# Altium PCB UVLO_MODULE_PCB ASCII REV Project_PCB_Rev.Project_SCH_Rev.PcbDoc
Units mil, origin at the board's own origin, x right, y up, seen from the top; angles counter-clockwise.
Board outline 2362.2 x 2362.2 mil, 2 copper layers (Top, Bottom), stack 61.811 mil thick; 70 components, 25 nets, 163 pads, 59 vias.
Unrouted connection lines stored in the file: 42.
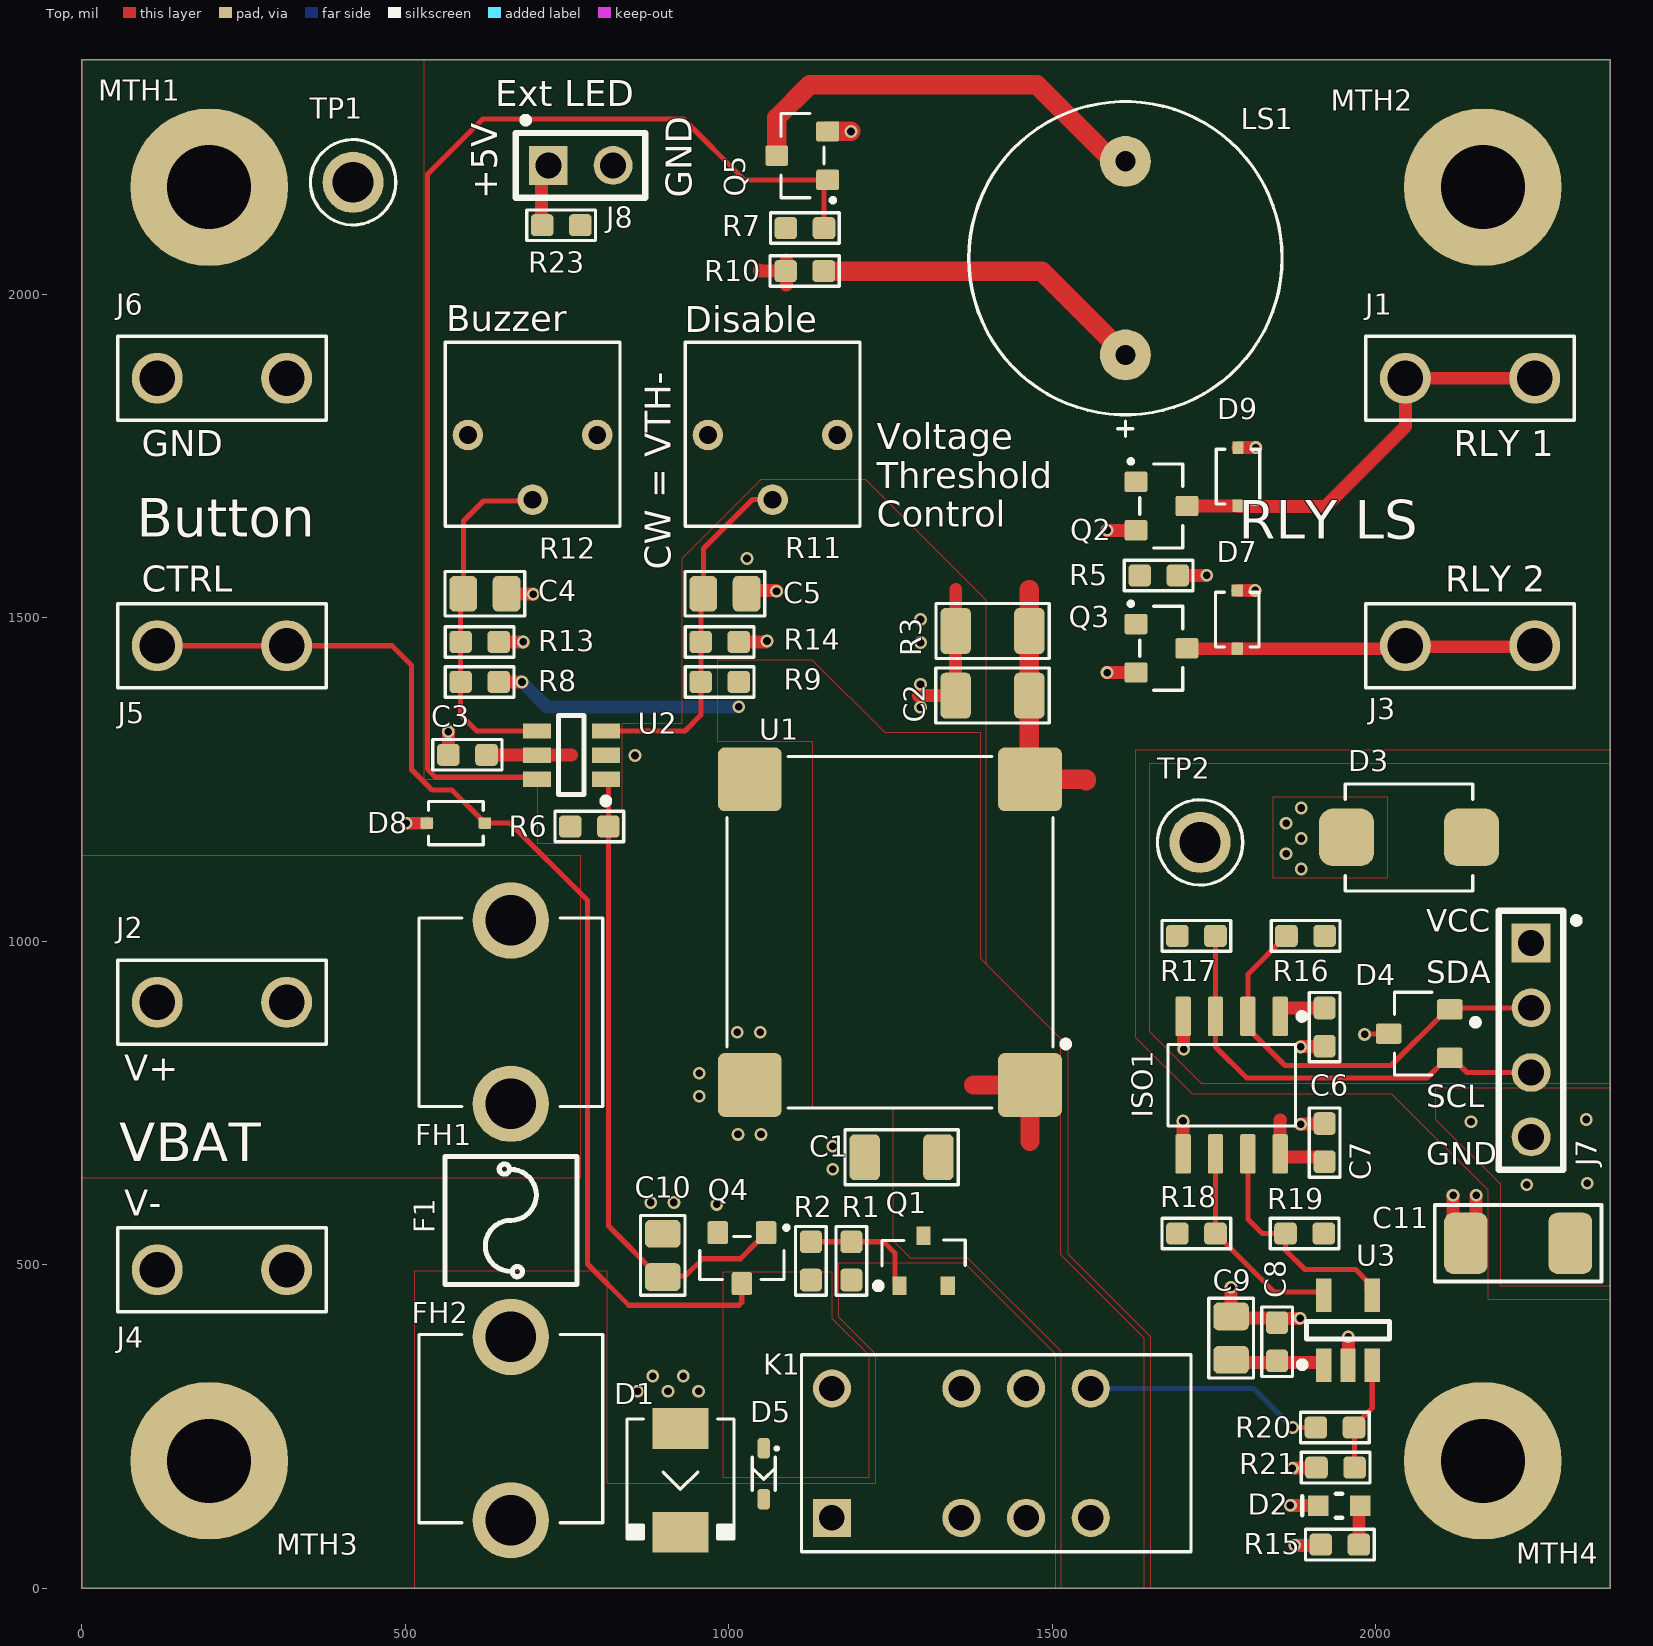
[diagram p0: Top view]
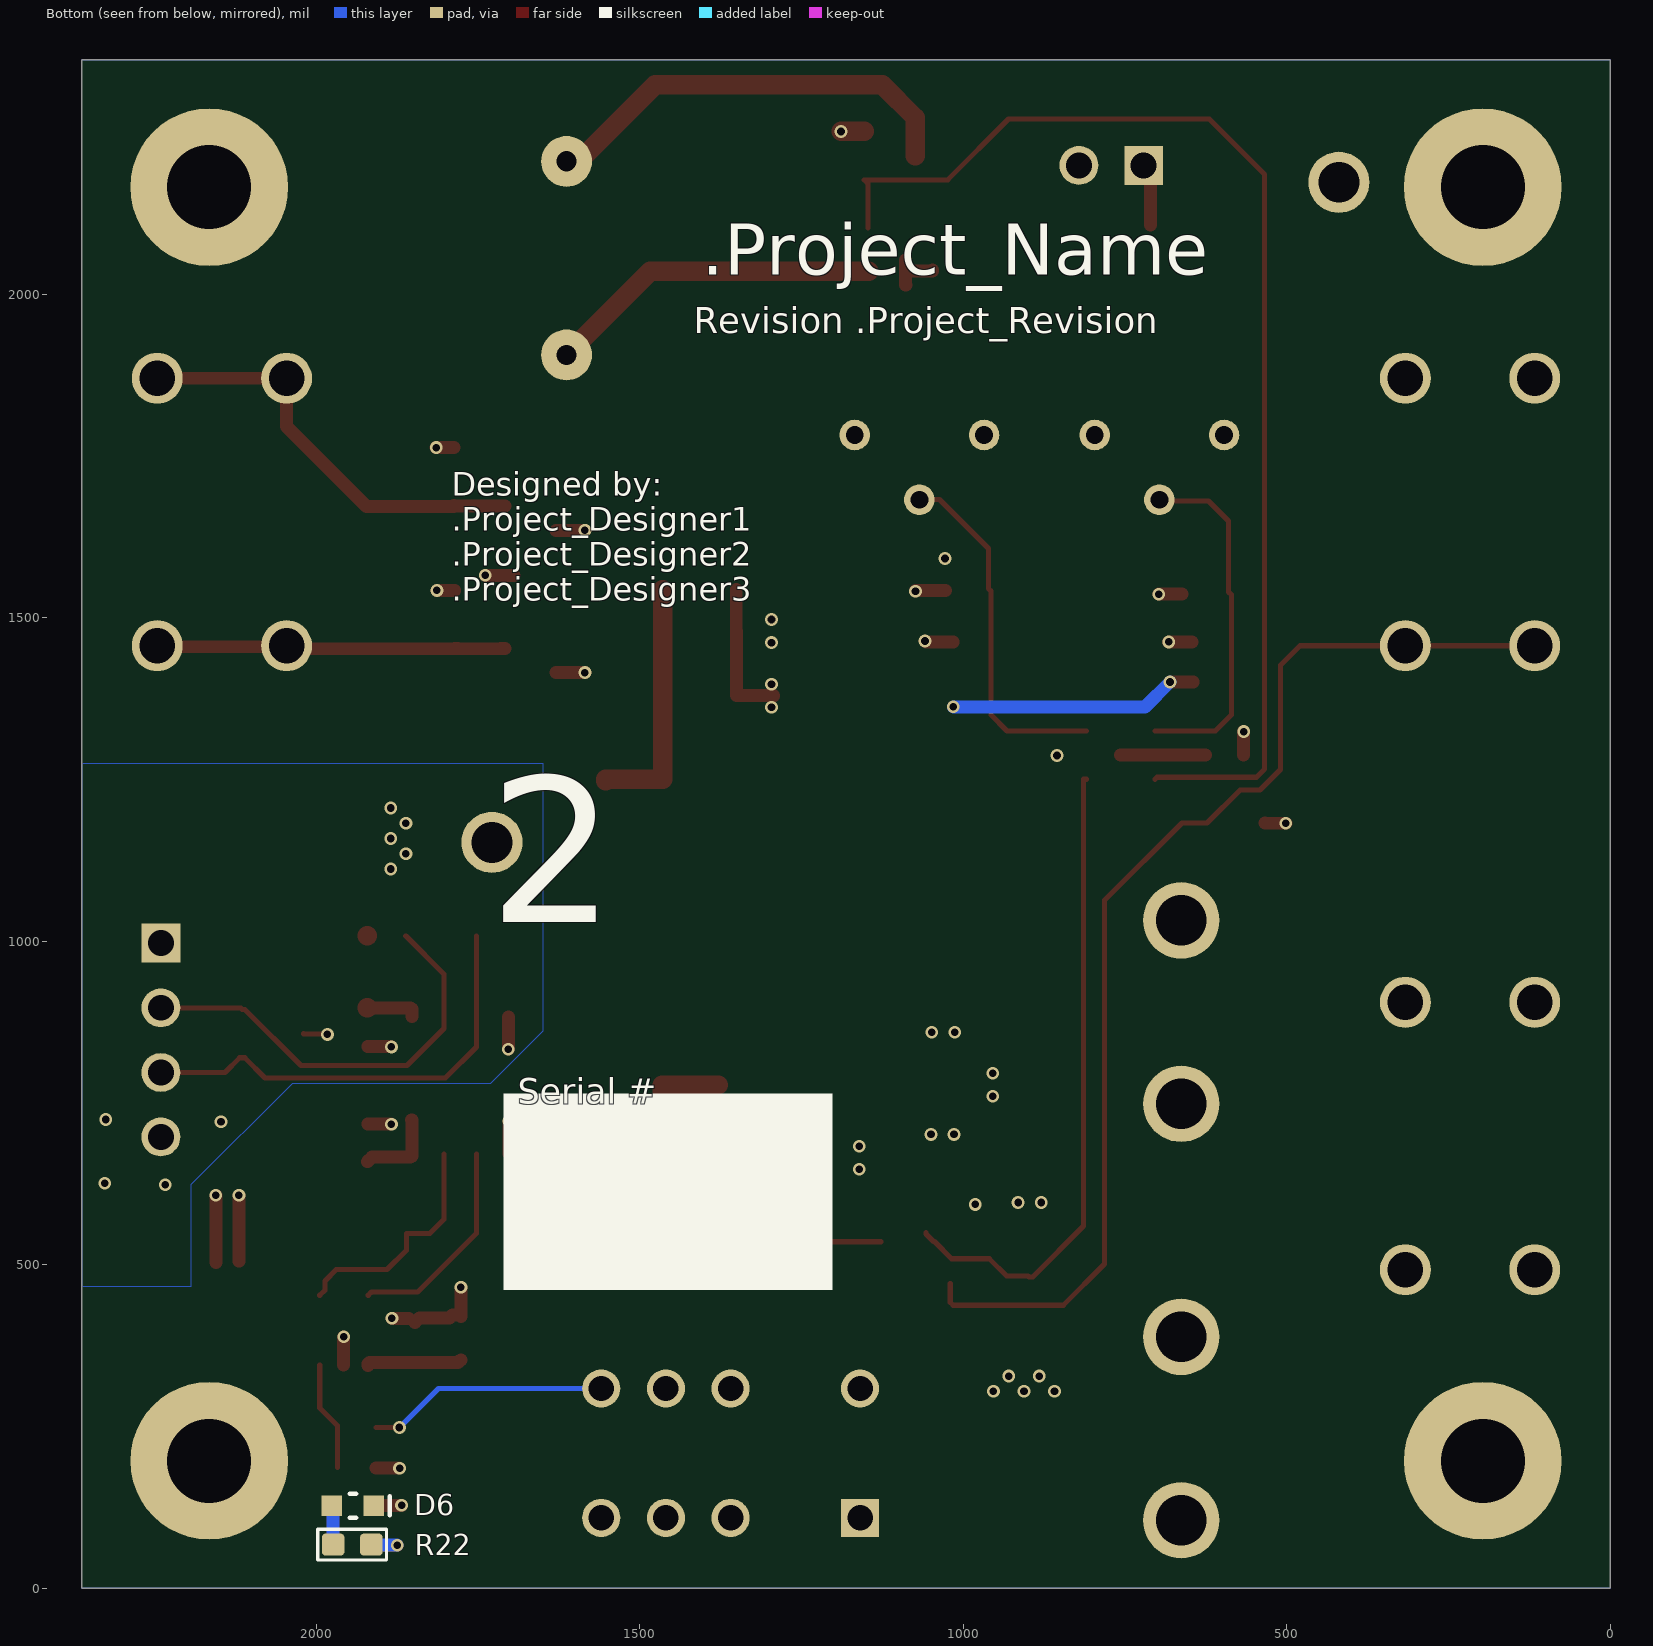
[diagram p1: Bottom view, seen from below]

## Layer stack, top to bottom
Top Solder: solder mask 1, Solder Resist, Dk 4
Top: signal copper 1.378
Dielectric 1: prepreg 59.0551, PP-006, Dk 4.3
Bottom: signal copper 1.378
Bottom Solder: solder mask 0.6, Solder Resist, Dk 3.5

## Board outline
0,0 0,2362.2 2362.2,2362.2 2362.2,0

## Design rules (kind name [scope] priority, off if disabled: settings)
AssemblyTestPointUsage [All] p0: scope1count=1 scope1_0_kind=Board scope1_0_value=Board scope2count=1 scope2_0_kind=Board scope2_0_value=Board commentlength=0
AssemblyTestpoint [All] p0: scope1count=1 scope1_0_kind=Board scope1_0_value=Board scope2count=1 scope2_0_kind=Board scope2_0_value=Board commentlength=0
BoardOutlineClearance BoardOutlineClearance-Silk [All] p0 off: scope1count=1 scope1_0_kind=Board scope1_0_value=Board scope2count=1 scope2_0_kind=Board scope2_0_value=Board commentlength=94 gap=0 // Protel DXP Scope 1 Expression Was: (OnLayer('Bottom Overlay')) OR (OnLayer('Top Overlay'))
BoardOutlineClearance [All] p0: scope1count=1 scope1_0_kind=Board scope1_0_value=Board scope2count=1 scope2_0_kind=Board scope2_0_value=Board commentlength=0 gap=7.87
BoardOutlineClearance BoardOutlineClearance-Silk [(OnLayer('Bottom Overlay')) OR (OnLayer('Top Overlay'))] p1: gap=0 ignorepadtopadclearanceinfootprint=FALSE
BoardOutlineClearance [All] p2: gap=7.87 ignorepadtopadclearanceinfootprint=FALSE
Clearance Clearance_EXT [All] p0 off: scope1count=1 scope1_0_kind=NetClass scope1_0_value=EXT scope2count=1 scope2_0_kind=Board scope2_0_value=Board commentlength=60 gap=20 // Protel DXP Scope 2 Expression Was: NOT InNetClass('EXT')
Clearance [All] p0: scope1count=1 scope1_0_kind=Board scope1_0_value=Board scope2count=1 scope2_0_kind=Board scope2_0_value=Board commentlength=0 gap=8
Clearance Clearance_EXT [InNetClass('EXT') vs NOT InNetClass('EXT')] p1: gap=20 ignorepadtopadclearanceinfootprint=FALSE
Clearance [All] p2: gap=8 ignorepadtopadclearanceinfootprint=FALSE except(12: THPad-THPad Via-Via)
ComponentClearance "Schematic Component Clearance Constraint" [All] p0: scope1count=1 scope1_0_kind=Component scope1_0_value=F1 scope2count=1 scope2_0_kind=Board scope2_0_value=Board commentlength=0 gap=0 collisioncheckmode=3
ComponentClearance [All] p0: scope1count=1 scope1_0_kind=Board scope1_0_value=Board scope2count=1 scope2_0_kind=Board scope2_0_value=Board commentlength=0 gap=10 collisioncheckmode=3
ComponentClearance "Schematic Component Clearance Constraint" [InComponent('F1')] p1: gap=0 collisioncheckmode=3 verticalgap=0 showdistances=FALSE
ComponentClearance [All] p2: gap=10 collisioncheckmode=3 verticalgap=10 showdistances=FALSE
DiffPairsRouting [All] p0: scope1count=1 scope1_0_kind=Board scope1_0_value=Board scope2count=1 scope2_0_kind=Board scope2_0_value=Board commentlength=0
DiffPairsRouting [All] p1: maxlimit=6 minlimit=6 mostfreqgap=6 toplayer_minwidth=4 toplayer_maxwidth=4 toplayer_prefwidth=4 bottomlayer_minwidth=4 bottomlayer_maxwidth=4 bottomlayer_prefwidth=4 maxuncoupledlength=500
FabricationTestPointUsage [All] p0: scope1count=1 scope1_0_kind=Board scope1_0_value=Board scope2count=1 scope2_0_kind=Board scope2_0_value=Board commentlength=0 valid=0 allowmultiple=FALSE
FabricationTestpoint [All] p0: scope1count=1 scope1_0_kind=Board scope1_0_value=Board scope2count=1 scope2_0_kind=Board scope2_0_value=Board commentlength=0 side=3 testpointundercomponent=TRUE minsize=40 maxsize=100 preferedsize=60 minholesize=0 maxholesize=40 preferedholesize=32 testpointgrid=1
FanoutControl Fanout_BGA [All] p0 off: scope1count=1 scope1_0_kind=Board scope1_0_value=Board scope2count=1 scope2_0_kind=Board scope2_0_value=Board commentlength=69 // Protel DXP Scope 1 Expression Was: IsBGA   Fanout_BGA (Default Rule)
FanoutControl Fanout_LCC [All] p0 off: scope1count=1 scope1_0_kind=Board scope1_0_value=Board scope2count=1 scope2_0_kind=Board scope2_0_value=Board commentlength=69 // Protel DXP Scope 1 Expression Was: IsLCC   Fanout_LCC (Default Rule)
FanoutControl Fanout_SOIC [All] p0 off: scope1count=1 scope1_0_kind=Board scope1_0_value=Board scope2count=1 scope2_0_kind=Board scope2_0_value=Board commentlength=71 // Protel DXP Scope 1 Expression Was: IsSOIC   Fanout_SOIC (Default Rule)
FanoutControl Fanout_Small [All] p0 off: scope1count=1 scope1_0_kind=Board scope1_0_value=Board scope2count=1 scope2_0_kind=Board scope2_0_value=Board commentlength=84 // Protel DXP Scope 1 Expression Was: (CompPinCount < 5)   Fanout_Small (Default Rule)
FanoutControl Fanout_Default [All] p0: scope1count=1 scope1_0_kind=Board scope1_0_value=Board scope2count=1 scope2_0_kind=Board scope2_0_value=Board commentlength=30 // Fanout_Default (Default Rule)
Height [All] p0: scope1count=1 scope1_0_kind=Board scope1_0_value=Board scope2count=1 scope2_0_kind=Board scope2_0_value=Board commentlength=0
HoleSize [All] p0: scope1count=1 scope1_0_kind=Board scope1_0_value=Board scope2count=1 scope2_0_kind=Board scope2_0_value=Board commentlength=0 absolutevalues=TRUE maxlimit=250 minlimit=7.87 maxpercent=80.000 minpercent=20.000
HoleSize [All] p1: absolutevalues=TRUE maxlimit=250 minlimit=7.87 maxpercent=80.000 minpercent=20.000
HoleToHoleClearance [All] p0: scope1count=1 scope1_0_kind=Board scope1_0_value=Board scope2count=1 scope2_0_kind=Board scope2_0_value=Board commentlength=0
HoleToHoleClearance [All] p1: gap=19.68 allowstackedmicrovias=TRUE
LayerPairs [All] p0: scope1count=1 scope1_0_kind=Board scope1_0_value=Board scope2count=1 scope2_0_kind=Board scope2_0_value=Board commentlength=0 enforce=TRUE
MinimumSolderMaskSliver [All] p0: scope1count=1 scope1_0_kind=Board scope1_0_value=Board scope2count=1 scope2_0_kind=Board scope2_0_value=Board commentlength=0
MinimumSolderMaskSliver [All] p1: minsoldermaskwidth=4
NetAntennae [All] p0: scope1count=1 scope1_0_kind=Board scope1_0_value=Board scope2count=1 scope2_0_kind=Board scope2_0_value=Board commentlength=0
PasteMaskExpansion [All] p0: scope1count=1 scope1_0_kind=Board scope1_0_value=Board scope2count=1 scope2_0_kind=Board scope2_0_value=Board commentlength=0 expansion=-1.97
PasteMaskExpansion [All] p1: expansion=-1.97
PlaneClearance [All] p0: scope1count=1 scope1_0_kind=Board scope1_0_value=Board scope2count=1 scope2_0_kind=Board scope2_0_value=Board commentlength=0 clearance=8
PlaneClearance [All] p1: clearance=8
PlaneConnect [All] p0: scope1count=1 scope1_0_kind=Board scope1_0_value=Board scope2count=1 scope2_0_kind=Board scope2_0_value=Board commentlength=0 planeconnectstyle=Relief reliefexpansion=20 reliefentries=4 reliefconductorwidth=10 reliefairgap=10
PlaneConnect [All] p1: pad.planeconnectstyle=Relief pad.reliefexpansion=20 pad.reliefentries=4 pad.reliefconductorwidth=10 pad.reliefairgap=10 via.planeconnectstyle=Direct via.reliefexpansion=20 via.reliefentries=4 via.reliefconductorwidth=10 via.reliefairgap=10
PolygonConnect [All] p0: scope1count=1 scope1_0_kind=Board scope1_0_value=Board scope2count=1 scope2_0_kind=Board scope2_0_value=Board commentlength=0 connectstyle=Relief reliefconductorwidth=10 reliefentries=4 polygonreliefangle="90 Angle"
PolygonConnect [All] p1: thpad.connectstyle=Relief thpad.reliefconductorwidth=10 thpad.reliefentries=4 thpad.polygonreliefangle="90 Angle" thpad.airgapwidth=10 smdpad.connectstyle=Relief smdpad.reliefconductorwidth=10 smdpad.reliefentries=4 smdpad.polygonreliefangle="90 Angle" smdpad.airgapwidth=10 via.connectstyle=Direct via.reliefconductorwidth=10 via.reliefentries=4 via.polygonreliefangle="90 Angle" via.airgapwidth=10
RoutingCorners [All] p0: scope1count=1 scope1_0_kind=Board scope1_0_value=Board scope2count=1 scope2_0_kind=Board scope2_0_value=Board commentlength=0 cornerstyle=45-Degree minsetback=100 maxsetback=100
RoutingLayers [All] p0: scope1count=1 scope1_0_kind=Board scope1_0_value=Board scope2count=1 scope2_0_kind=Board scope2_0_value=Board commentlength=0 top layer=Automatic bottom layer=Automatic
RoutingPriority [All] p0: scope1count=1 scope1_0_kind=Board scope1_0_value=Board scope2count=1 scope2_0_kind=Board scope2_0_value=Board commentlength=0
RoutingTopology [All] p0: scope1count=1 scope1_0_kind=Board scope1_0_value=Board scope2count=1 scope2_0_kind=Board scope2_0_value=Board commentlength=0 topology=Shortest
RoutingVias [All] p0: scope1count=1 scope1_0_kind=Board scope1_0_value=Board scope2count=1 scope2_0_kind=Board scope2_0_value=Board commentlength=0 holewidth=11.81 width=19.68 viastyle="Through Hole" minholewidth=11.81 minwidth=19.68 maxholewidth=248.03 maxwidth=275.59
RoutingVias [All] p1: holewidth=11.81 width=19.68 viastyle="Through Hole" minholewidth=11.81 minwidth=19.68 maxholewidth=248.03 maxwidth=275.59
ShortCircuit [All] p0: scope1count=1 scope1_0_kind=Board scope1_0_value=Board scope2count=1 scope2_0_kind=Board scope2_0_value=Board commentlength=0 allowed=FALSE
SilkToBoardRegionClearance [All] p0: scope1count=1 scope1_0_kind=Board scope1_0_value=Board scope2count=1 scope2_0_kind=Board scope2_0_value=Board commentlength=0
SilkToSilkClearance [All] p0: scope1count=1 scope1_0_kind=Board scope1_0_value=Board scope2count=1 scope2_0_kind=Board scope2_0_value=Board commentlength=0
SilkToSilkClearance [All] p1: silktosilkclearance=5.91
SilkToSolderMaskClearance [All] p0 off: scope1count=1 scope1_0_kind=Board scope1_0_value=Board scope2count=1 scope2_0_kind=Board scope2_0_value=Board commentlength=44 // Protel DXP Scope 1 Expression Was: IsPad
SilkToSolderMaskClearance [IsPad] p1: minsilkscreentomaskgap=0 clearancetoexposedcopper=FALSE
SolderMaskExpansion [All] p0: scope1count=1 scope1_0_kind=Board scope1_0_value=Board scope2count=1 scope2_0_kind=Board scope2_0_value=Board commentlength=0 expansion=2.76
SolderMaskExpansion [All] p1: expansion=2.76 istentingtop=FALSE
UnRoutedNet [All] p0: scope1count=1 scope1_0_kind=Board scope1_0_value=Board scope2count=1 scope2_0_kind=Board scope2_0_value=Board commentlength=0
UnpouredPolygon [All] p0: scope1count=1 scope1_0_kind=Board scope1_0_value=Board scope2count=1 scope2_0_kind=Board scope2_0_value=Board commentlength=0
Width [All] p0: scope1count=1 scope1_0_kind=Board scope1_0_value=Board scope2count=1 scope2_0_kind=Board scope2_0_value=Board commentlength=0 maxlimit=100 minlimit=8 preferedwidth=8
Width [All] p1: maxlimit=100 minlimit=8 preferedwidth=8 minimp=50.000000 maximp=50.000000 favimp=50.000000
20 further rules are at their usual default settings.

## Classes and differential pairs
net class EXT: EXT_SCL EXT_SDA GND_EXT VCC_EXT

## Components (designator, comment, footprint, x,y, rotation, side; value= is the part's Value field where it differs from the comment)
C1 "GRT31CR61H106KE01L" CAP_CER_1206 1267,666 r0 top
C2 "CL31A226KAHNNNE" CAP_CER_1206 1407.59,1379.55 r0 top
C3 "CC0603KRX7R9BB104" CAP_CER_0603 596,1288 r0 top
C4 "LMK212BJ106KG-T" CAP_CER_0805 623,1537 r180 top
C5 "LMK212BJ106KG-T" CAP_CER_0805 994,1537 r180 top
C6 "CC0603KRX7R9BB104" CAP_CER_0603 1920.91,867.26 r90 top
C7 "CC0603KRX7R9BB104" CAP_CER_0603 1920.9,688.59 r270 top
C8 "CC0603KRX7R9BB104" CAP_CER_0603 1847.46,380.85 r270 top
C9 "LMK212BJ106KG-T" CAP_CER_0805 1776.35,386.42 r270 top
C10 "LMK212BJ106KG-T" CAP_CER_0805 897.95,514.26 r270 top
C11 "1808HC102KAT1A" CAP_CER_1808 2220,533.06 r0 top
D1 "SMBJ12D-M3/H" TVS_SMBJ12D-M3/H 925.21,166.57 r270 top
D2 "SML-D12P8WT86" LED_SML-D12P8WT86 1943.4,127.24 r0 top
D3 "SMBJ5.0CA" TVS_PWR_SMBJ5.0CA 2051.34,1160.39 r180 top
D4 "STZU6.2NT146" TVS_DATA_STZU6.2NT146 2067.11,857.09 r180 top
D5 "1N4148WT" DIO_1N4148WT 1053.95,176.85 r270 top
D6 "SML-D12P8WT86" LED_SML-D12P8WT86 1943.4,127.24 r0 bottom
D7 "SD12C-01FTG" TVS_DATA_SD12C-01FTG 1785.81,1497.13 r90 top
D8 "SD12C-01FTG" TVS_DATA_SD12C-01FTG 578.16,1182.51 r180 top
D9 "SD12C-01FTG" TVS_DATA_SD12C-01FTG 1787,1718 r90 top
F1 "5MF 500-R" "FUS_5MF 500-R" 22729,21897 r90 top
FH1 "FC-201-22" FHO_FC-201-22 663.03,890.29 r90 top
FH2 "FC-201-22" FHO_FC-201-22 663.03,246.57 r90 top
ISO1 "SI8602AC-B-IS" ISO_SI8602AC-B-IS 1777.26,777.39 r270 top
J1 "1217861-1" CON_1217861-1 2145.67,1870.08 r90 top
J2 "1217861-1" CON_1217861-1 216.54,905.51 r90 top
J3 "1217861-1" CON_1217861-1 2145.67,1456.69 r90 top
J4 "1217861-1" CON_1217861-1 216.54,492.13 r90 top
J5 "1217861-1" CON_1217861-1 216.54,1456.69 r90 top
J6 "1217861-1" CON_1217861-1 216.54,1870.08 r90 top
J7 "CON_HDR_1X4" CON_HDR_1X4 2240,697.39 r0 top
J8 "CON_HDR_1x2" CON_HDR_1X2 770.99,2199.15 r90 top
K1 "EC2-12NU" RLY_EC2-12NU 1409.44,208.58 r0 top
LS1 "CMI-1295-0585T" UND_SPK_CMI-1295-0585T 1613.05,2055.7 r180 top
MTH1 "M3" MTH_M3 196.85,2165.35 r0 top
MTH2 "M3" MTH_M3 2165.35,2165.35 r0 top
MTH3 "M3" MTH_M3 196.85,196.85 r0 top
MTH4 "M3" MTH_M3 2165.35,196.85 r0 top
Q1 "SI2369DS-T1-GE3" TRX_PMOS_SI2369DS-T1-GE3 1301.03,505.93 r90 top
Q2 "SI2310-TP" TRX_NMOS_SI2310-TP 1668.65,1672.6 r0 top
Q3 "SI2310-TP" TRX_NMOS_SI2310-TP 1668.65,1452.66 r0 top
Q4 "SI2310-TP" TRX_NMOS_SI2310-TP 1020.22,510.03 r270 top
Q5 "SI2310-TP" TRX_NMOS_SI2310-TP 1113.43,2214.16 r180 top
R1 "RC0603FR-0710KL" RES_0603 1189.37,505.83 r270 top
R2 "RC0603FR-0710KL" RES_0603 1126.85,505.83 r90 top
R3 "RC1206FR-07330RL" RES_1206 1407.59,1479.42 r0 top
R5 "RC0603FR-073KL" RES_0603 1664.46,1565.3 r180 top
R6 "RC0603FR-07100KL" RES_0603 784.37,1177.19 r180 top
R7 "RC0603FR-07100KL" RES_0603 1117.62,2102.22 r180 top
R8 "RC0603FR-07100KL" RES_0603 614.87,1400.69 r0 top
R9 "RC0603FR-07100KL" RES_0603 985.83,1400.69 r0 top
R10 "RC0603JR-070RL" RES_0603 1117.24,2035.73 r180 top
R11 "3362P-1-103LF" POT_3362P-1-103LF 1067.66,1782.34 r180 top
R12 "3362P-1-103LF" POT_3362P-1-103LF 696.7,1782.34 r180 top
R13 "RC0603FR-0710KL" RES_0603 614.87,1462.54 r180 top
R14 "RC0603FR-0710KL" RES_0603 985.83,1462.54 r180 top
R15 "RC0603FR-07402RL" RES_0603 1944.34,67.3 r0 top
R16 "RC0603FR-073KL" RES_0603 1891.38,1008.13 r0 top
R17 "RC0603FR-073KL" RES_0603 1722.68,1008.13 r180 top
R18 "RC0603FR-073KL" RES_0603 1722.68,548.1 r180 top
R19 "RC0603FR-073KL" RES_0603 1890,548.09 r0 top
R20 "RC0603FR-0710KL" RES_0603 1936.82,248.31 r180 top
R21 "RC0603FR-073KL" RES_0603 1937.77,186.33 r0 top
R22 "RC0603FR-07402RL" RES_0603 1944.35,67.3 r0 bottom
R23 "RC0603FR-07402RL" RES_0603 740.95,2106.67 r180 top
TP1 "5011" TPO_5011 419.19,2172.98 r0 top
TP2 "5011" TPO_5011 1728.32,1152.6 r0 top
U1 "K7805JT-500R3" REG_SWR_K7805JT-500R3 1248.97,1013.89 r180 top
U2 "TPS3700DDCR" CMP_TPS3700DDCR 756.68,1287.57 r180 top
U3 "MCP3021A5T-E/OT" ADC_MCP3021A5T-E/OT 1957,398.55 r90 top

## Footprints (in the part's own frame and the unit in brackets; to place one, negate y for a bottom-side part, rotate by r counter-clockwise, add the part's x,y. Pads: shape width x height; smd on the part's side, far side on the other; paste and mask are expansions set on the pad)
ADC_MCP3021A5T-E/OT [mm]
  rect 1.321x0.6 smd paste-0.05 mask+0: 1(-1.375,0.95) 2(-1.375,0) 3(-1.375,-0.95) 4(1.375,-0.95) 5(1.375,0.95)
  silkscreen extent -1.47,-1.63 0.35,1.92
CAP_CER_0603 [mil] "Ceramic Capacitor - 0603"
  rrect35% 35x34 smd paste+0 mask+0: 1(-29.5,0) 2(29.5,0)
  silkscreen extent -54,-24 54,24
CAP_CER_0805 [mil] "Ceramic Capacitor - 0805"
  rrect37% 43x55 smd paste+0 mask+0: 1(-33.5,0) 2(33.5,0)
  silkscreen extent -62,-34 62,35
CAP_CER_1206 [mil] "Ceramic Capacitor - 1206"
  rrect34% 47x71 smd paste+0 mask+0: 1(-57,0) 2(57,0)
  silkscreen extent -88,-42 88,43
CAP_CER_1808 [mm] "Chip Capacitor, 2-Leads, Body 4,60x2,00mm, IPC Medium Density"
  rrect40% 1.71x2.4 smd paste-0.025 mask+0: 1(-2.05,0) 2(2.05,0)
  silkscreen extent -3.27,-1.5 3.27,1.5
CMP_TPS3700DDCR [mm]
  rect 1.1x0.6 smd paste+0 mask+0: 1(-1.35,0.95) 2(-1.35,0) 3(-1.35,-0.95) 4(1.35,-0.95) 5(1.35,0) 6(1.35,0.95)
  silkscreen extent -1.47,-1.55 0.5,1.92
CON_1217861-1 [mm]
  round 2 hole 1.4: 1(0,2.54) 1(0,-2.54)
  silkscreen extent -1.65,-4.09 1.65,4.09
CON_HDR_1X2 [mil]
  rect 60x60 hole 40: 1(0,50)
  round 60 hole 40: 2(0,-50)
  silkscreen extent -50,-100 75,100
CON_HDR_1X4 [mil]
  rect 60x60 hole 40 paste+0 mask+0: 1(0,299.61)
  round 60 hole 40 paste+0 mask+0: 2(0,199.61) 3(0,99.61) 4(0,0)
  silkscreen extent -50,-50 75,350
DIO_1N4148WT [mm] "SODFL, 2-Leads, Body 0,80x1,60mm, IPC Medium Density"
  rrect50% 0.8x0.5 smd paste+0 mask+0: A(-1,0) K(1,0)
  silkscreen extent -1.04,-0.45 0.65,0.56
FHO_FC-201-22 [mm]
  round 3 hole 1.98 mask+0: 1(-3.6,0) 1(3.6,0)
  silkscreen extent -3.7,-3.61 3.7,3.61
"FUS_5MF 500-R" [mil]
  silkscreen extent -21428,21964 -21230,22168
ISO_SI8602AC-B-IS [mm]
  rrect20% 1.55x0.6 smd paste-0.025 mask+0: 1(-2.7,1.905) 2(-2.7,0.635) 3(-2.7,-0.635) 4(-2.7,-1.905) 5(2.7,-1.905) 6(2.7,-0.635) 7(2.7,0.635) 8(2.7,1.905)
  silkscreen extent -2.82,-2.5 1.6,2.88
LED_SML-D12P8WT86 [mm] "0603"
  rect 0.8x0.8 smd paste-0.025 mask+0: A(0.825,0) K(-0.825,0)
  silkscreen extent -1.45,-0.48 0.13,0.48
MTH_M3 [mm] "Mounting Hole Metric M3"
  round 6.2 hole 3.3 paste-7.62 mask+0: 1(0,0)
POT_3362P-1-103LF [mm]
  round 1.2 hole 0.7: 1(-2.54,0) 2(0,2.54) 3(2.54,0)
  silkscreen extent -3.43,-3.65 3.43,3.58
REG_SWR_K7805JT-500R3 [mm]
  rrect20% 2.5x2.5 smd paste-0.025 mask+0: 1(-5.5,6) 2(5.5,6) 3(-5.5,-6) 4(5.5,-6)
  silkscreen extent -7.03,-6.9 6.4,6.9
RES_0603 [mil] "Resistor - 0603"
  rrect35% 35x34 smd paste+0 mask+0: 1(-29.5,0) 2(29.5,0)
  silkscreen extent -53,-24 53,24
RES_1206 [mil] "Resistor - 1206"
  rrect34% 47x71 smd paste+0 mask+0: 1(-57,0) 2(57,0)
  silkscreen extent -88,-42 88,43
RLY_EC2-12NU [mm]
  rect 1.5x1.5 hole 1: 1(-6.35,-2.54)
  round 1.5 hole 1: 3(-1.27,-2.54) 4(1.27,-2.54) 5(3.81,-2.54) 8(3.81,2.54) 9(1.27,2.54) 10(-1.27,2.54) 12(-6.35,2.54)
  silkscreen extent -7.55,-3.87 7.75,3.87
TPO_5011 [mm]
  round 2.4 hole 1.6: 1(0,0)
  silkscreen extent -1.67,-1.68 1.68,1.68
TRX_NMOS_SI2310-TP [mm]
  rrect20% 0.9x0.8 smd paste-0.025 mask+0: 1(-1,0.95) 2(-1,-0.95) 3(1,0)
  silkscreen extent -1.24,-1.65 0.84,1.79
TRX_PMOS_SI2369DS-T1-GE3 [mm]
  rect 0.724x0.559 smd paste-0.025 mask+0: 1(-0.984,0.95) 2(-0.984,-0.95) 3(0.984,0)
  silkscreen extent -1.11,-1.63 0.81,1.9
TVS_DATA_SD12C-01FTG [mm]
  rrect20% 0.49x0.45 smd paste-0.025 mask+0: 1(-1.14,0) 2(1.14,0)
  silkscreen extent -1.07,-0.85 1.07,0.85
TVS_DATA_STZU6.2NT146 [mm] "SOT23, 3-Leads, Body 2.90x2.80mm, Pitch 0.95mm, IPC Medium Density"
  rrect20% 1x0.8 smd paste-0.05 mask+0: 1(-1.2,-0.95) 2(-1.2,0.95) 3(1.2,0)
  silkscreen extent -2.33,-1.63 0.97,1.63
TVS_PWR_SMBJ5.0CA [mm] "Molded Diode, 2-Leads, Body 4,40x3,62mm, IPC Medium Density"
  rrect50% 2.16x2.26 smd paste-0.025 mask+0: 1(-2.45,0) 2(2.45,0)
  silkscreen extent -2.5,-2.1 2.5,2.1
TVS_SMBJ12D-M3/H [mm]
  rect 1.6x2.2 smd paste-0.025 mask+0: 1(-2.032,0) 2(2.032,0)
  silkscreen extent -2.41,-2.1 2.3,2.1
UND_SPK_CMI-1295-0585T [mm]
  round 2 hole 0.8: 1(0,3.8) 2(0,-3.8)
  silkscreen extent -6.15,-6.15 6.15,7

## Part data
C1: library part CAP_CER_GRT31CR61H106KE01L, "CAP - CER 10UF 10% 50V X5R - 1206"
C2: library part CAP_CER_CL31A226KAHNNNE, "CAP - CER 22uF 10% 25V X5R - 1206"
C3 C6 C7 C8: library part CAP_CER_CC0603KRX7R9BB104, "CAP - CER 100nF 50V X7R - 0603"
C4 C5 C9 C10: library part CAP_CER_LMK212BJ106KG-T, "CAP - CER 10UF 10% 10V X5R - 0805"
C11: library part CAP_CER_1808HC102KAT1A, "CAP - CER 1nF 10% 3kV X7R - 1808"
D1: library part TVS_SMBJ12D-M3/H, "TVS - DIODE 12V 19.6V - DO-214AA"
D2 D6: library part LED_SML-D12P8WT86, "LED - GREEN DIFFUSED 0603 SMD - 0603"
D3: library part TVS_PWR_SMBJ5.0CA, "TVS - BIDIR 5V 9.2V 600W - DO214AA"
D4: library part TVS_DATA_STZU6.2NT146, "TVS - TVS DIODE 5.5V 5.9V - SOT-23-3"
D5: library part DIO_1N4148WT, "DIO - 1N4148WT - SOD-523F"
D7 D8 D9: library part TVS_DATA_SD12C-01FTG, "TVS - BIDIR 12V 450W - SOD-323"
F1: library part "FUS_5MF 500-R", "FUS - CARTRIDGE GLASS 500mA 250VAC/125VDC - 5X20mm"
FH1 FH2: library part FHO_FC-201-22, "FHO - FUSE CLIP 5mm CARTRIDGE 10A PCB - 2-TH"
ISO1: library part ISO_SI8602AC-B-IS, "ISO - DGTL ISO 600V 2CH I2C  - 8-SOIC"
J1 J2 J3 J4 J5 J6: library part CON_1217861-1, "CON - Quick connect tab - TH"
J7: "CON - Header 1X4 pins, 100Mils - TH-4"
J8: library part CON_HDR_1X2, "CON - Header 1x2 pins 100 mil -TH"
K1: library part RLY_EC2-12NU, "RLY - GENERAL PURPOSE DPDT 2A 12V - TH-8"
LS1: library part UND_LS_CMI-1295-0585T, "LS - Buzzer indicator 5V 30mA 2.3kHz 85dB - TH"
MTH1 MTH2 MTH3 MTH4: library part MTH_M3, "MTH - MOUNTING HOLE M3 PLATED - M3"
Q1: library part TRX_PMOS_SI2369DS-T1-GE3, "TRX - PMOS 30V 7.6A - SOT-23"
Q2 Q3 Q4 Q5: library part TRX_NMOS_SI2310-TP, "TRX - MOSFET N-CH 60V 3A - SOT-23"
R1 R2 R13 R14 R20: library part RES_RC0603FR-0710KL, "RES - 10k 1% 1/10W - 0603"
R3: library part RES_RC1206FR-07330RL, "RES - 330 OHM 1% 1/4W - 1206"
R5 R16 R17 R18 R19 R21: library part RES_RC0603FR-073KL, "RES - 3k 1% 1/10W - 0603"
R6 R7 R8 R9: library part RES_RC0603FR-07100KL, "RES - 100k 1% 1/10W - 0603"
R10: library part RES_RC0603JR-070RL, "RES - 0 ohm jumper 1/10W - 0603"
R11 R12: library part POT_3362P-1-103LF, "RES -  POT 10K 1/2W LINEAR PLASTIC 1 turn - TH"
R15 R22 R23: library part RES_RC0603FR-07402RL, "RES - 402R 1% 1/10W - 0603"
TP1 TP2: library part TPO_5011, "TPO - TEST POINT - TH"
U1: library part REG_SWR_K7805JT-500R3, "REG_DC DC CONVERTER 5V 2.5W - 4-SMD Module"
U2: library part CMP_TPS3700DDCR, "CMP - Comparator Window Open Drain - TSOT-23-6"
U3: library part ADC_MCP3021A5T-E/OT, "ADC - IC ADC 10BIT I2C 22.3KSPS - SOT-23-5"

## Via types
v1: diameter 19.68, hole 11.81, Top to Bottom, tented both sides, 58 vias
v2: diameter 19.68, hole 11.81, Top to Bottom, 1 vias

## Nets (pads, with @x,y where several pads share a name; then routed paths per layer and width w, separated by ;. In a path a pad name is that pad's centre, name@x,y a point inside that pad or via, vN(x,y) a via of type N, cw(c..) or ccw(c..) an arc to the next point about the centre after c; other vN are vias at no path point)
5V: C2.2 C3.2 C7.2 C8.2 C9.2 ISO1.8 Q2.1 Q3.1 R3.2 R5.2 R6.2 R7.2 R10.2 R15.1 R18.2 R19.2 R22.1 R23.1 U1.3 U2.5 U3.1 | length 957
  Top w8: v1(1874.71,66.09) v1@1875.32,66.69 ; R15.1@1911.27,66.69 R15.1@1911.88,67.3
  Top w20: C3.2 756.25,1288 756.68,1287.57 ; 1047.4,2037.6 1047.4,2035.73 R10.2 ; 1088.25,2013.93 1089.09,2013.93 1089.09,2052.95 ; C9.2 1780.6,348.67 1917.79,348.67 1919.6,346.86 U3.1 ; 1852.38,723.82 1852.26,723.82 ISO1.8 1852.26,667.9 1854.07,666.09 1913.9,666.09 C7.2 ; v1(1874.71,66.09) 1913.64,66.09 R15.1
  Top w30: 1464.59,1543.63 R3.2 C2.2 1464.59,1250.11 U1.3 1552.58,1250.11 1552.58,1247.58
  Bottom w8: v1(1874.71,66.09) v1@1875.32,66.69 ; R22.1@1914.24,66.69 R22.1
  Bottom w20: v1@1875.32,66.69 R22.1@1914.24,66.69
ADC_SCL: ISO1.6 R18.1 U3.5 | length 330
  Top w8: ISO1.6 1752.22,671.05 R18.1 R18.1 1752.68,548.1 1843.17,457.61 1914.68,457.61 U3.5
ADC_SDA: ISO1.7 R19.1 U3.4 | length 365.1
  Top w8: ISO1.7 1802.26,570.26 1824.42,548.09 R19.1 1860.5,522.27 1890.49,492.29 1969.02,492.29 1986.59,474.72 1986.59,460.5 U3.4
BUZZ_HS: LS1.1 R10.1 | length 521
  Top w30: R10.1@1145.78,2035.73 R10.1 1483.41,2035.73 LS1.1
BUZZ_LS: LS1.2 Q5.3 | length 673.3
  Top w30: Q5.3 1074.06,2272.75 1124.8,2323.49 1476.29,2323.49 LS1.2@1611.7,2188.08
EXT_SCL: D4.2 ISO1.3 J7.3 R17.1 | length 701.9
  Top w8: R17.1 1752.22,1008.09 ISO1.3 ISO1.3 1752.18,883.61 1752.18,836.55 1800.41,788.31 2079.05,788.31 2110.42,819.69 D4.2 2118.3,819.69 2141.12,796.86 J7.3@2240,796.86
EXT_SDA: D4.1 ISO1.2 J7.2 R16.1 | length 666.6
  Top w8: R16.1 1861.38,1008.13 1802.26,949 ISO1.2 1802.26,864.99 1859.65,807.59 2023.52,807.59 2110.42,894.49 D4.1 2116.73,896.86 J7.2@2240,896.86
GND: C1.1 C2.1 C3.1 C4.1 C5.1 C7.1 C8.1 C9.1 C10.1 C11.1 D1.1 D2.K D6.K D7.2 D8.2 D9.2 ISO1.5 J4.1 J6.1 J8.2 Q2.2 Q3.2 Q4.2 Q5.2 R3.1 R5.1 R11.1 R12.1 R13.1 R14.1 R21.1 TP1.1 U1.2 U2.2 U3.2 | length 1241.5
  Top w8: Q2.2@1629.12,1635.03 Q2.2 ; ISO1.5@1702,671.35 ISO1.5 ; v1(1871.11,185.12) v1@1871.71,185.73 ; v1(1883.74,716.88) v1@1884.34,717.49 ; R21.1@1907.67,185.73 R21.1 ; C7.1@1920.3,717.49 C7.1 ; U3.2 U3.2@1957.55,344.96 ; v1(1957.35,388.42) v1@1957.55,388.23
  Top w20: v1(501.21,1182.28) 533.04,1182.28 D8.2 D8.2@533.4,1182.39 ; C3.1 v1(566.5,1323.96) ; R13.1@646.36,1462.53 v1(682.31,1462.53) ; C4.1@661.74,1536.31 v1(697.69,1536.31) ; R14.1 1057.54,1462.54 v1(1059,1464) ; C5.1@1027.5,1542 1073.78,1542 v1(1073.78,1541.06) ; 1292.93,1379.09 1292.93,1379.55 C2.1 R3.1 1350.73,1479.42 1350.73,1543.62 ; v1(1584.67,1415.1) Q3.2@1629.12,1415.1 ; v1(1584.67,1635.03) Q2.2@1629.12,1635.03 ; R5.1@1694.12,1565.46 v1(1738.58,1565.46) ; ISO1.5@1702,671.35 v1(1702,722) ; C9.1 v2(1776.35,464.89) ; C9.1@1782.43,422.34 1789.37,422.34 1793.85,417.85 1833.85,417.85 1840.46,417.85 1847.46,410.85 C8.1 ; D7.2 1785.94,1542.14 v1(1813.43,1542.14) ; D9.2@1786.87,1762.76 D9.2 v1(1814.49,1762.88) ; C8.1@1856.99,417 v1(1883,417) ; v1(1868,128) 1910.17,128 D2.K ; v1@1871.71,185.73 R21.1@1907.67,185.73 ; v1@1884.34,717.49 C7.1@1920.3,717.49 ; U3.2@1957.55,344.96 v1@1957.55,388.23 ; C11.1@2119.5,505.25 v1(2119.5,607.29) ; C11.1@2155.08,503.66 v1(2155.08,607.29)
  Top w30: Q5.2 v1(1188.76,2251.56)
  Bottom w8: D6.K@1909.71,126.03 D6.K
  other v1: 858.75,304.14 905.99,304.14 953.24,304.14 882.37,327.76 929.61,327.76 981.23,593.13 879.51,596.02 915.09,596.02 1160.49,647.42 1160.49,683 1014.17,701.34 1049.75,701.34 954.18,760.23 954.18,795.81 1012.95,859.22 1048.53,859.22 855,1287 1296.31,1361.64 1296.31,1397.23 1296.31,1461.52 1296.31,1497.1 1027.99,1591.51
GND_EXT: C6.1 C11.2 D3.2 D4.3 ISO1.4 J7.4 TP2.1 | length 126.3
  Top w8: ISO1.4 ISO1.4@1703,882.95 ; v1(1883.74,836.55) v1@1884.35,837.15 ; C6.1@1920.3,837.15 C6.1 ; v1(1982.7,855.88) 1983.31,856.48 2019.26,856.48 D4.3
  Top w20: v1(1703,833) ISO1.4@1703,882.95 ; v1@1884.35,837.15 C6.1@1920.3,837.15
  other v1: 2233.39,623.68 2326.67,625.86 2147.08,720.89 2325.36,724.37 1884.94,1111.45 1861.32,1135.07 1884.94,1158.69 1861.32,1182.32 1884.94,1205.94
NetC4_2: C4.2 R8.1 R12.2 R13.2 U2.4 | length 550.3
  Top w8: R12.2 694.66,1680.3 620.84,1680.3 589.79,1649.25 589.79,1539.84 585.37,1535.42 R13.2 R8.1 585.37,1349.9 610.3,1324.97 U2.4
NetC5_2: C5.2 R9.1 R11.2 R14.2 U2.3 | length 554.4
  Top w8: U2.3 932.1,1324.97 957.07,1349.94 957.07,1405.33 957.07,1467.17 957.07,1541.19 960.75,1544.87 960.75,1606.81 1036.51,1682.57 1067.43,1682.57 R11.2
NetD2_A: D2.A R15.2 | length 60.8
  Top w8: D2.A@1973.84,125.2 D2.A
  Top w20: R15.2 D2.A@1973.84,125.2
NetD6_A: D6.A R22.2 | length 60.8
  Bottom w8: D6.A@1973.85,125.21 D6.A
  Bottom w20: R22.2 D6.A@1973.85,125.21
NetJ8_1: J8.1 R23.2 | length 75.3
  Top w20: R23.2@710.44,2106.67 710.44,2181.63 J8.1@710.7,2181.9
NetR20_1: R20.1 R21.2 U3.3 | length 169.3
  Top w8: R21.2 1967.27,251.14 1994.4,278.27 U3.3
OUTA: C10.2 Q4.1 R6.1 U2.1 | length 1000.5
  Top w8: U2.1 813.87,1250.17 R6.1 813.87,559.58 892.52,480.92 898.12,480.92 899.6,482.41 932.77,482.41 959.54,509.18 1017.87,509.18 1044.36,535.68 1045.88,535.68 1057.63,547.43 Q4.1
OUTB: Q5.1 R7.1 U2.6 | length 1865.2
  Top w8: U2.6 700.33,1253.37 546.63,1253.37 534,1266 534,2184.98 619.74,2270.72 929.98,2270.72 1023.95,2176.76 Q5.1 1147.12,2171.08 R7.1
RLY_LS_1: D9.1 J1.1 Q2.3 | length 663.7
  Top w20: Q2.3 1715.74,1672.6 1786.48,1672.6 D9.1 ; D9.1@1787,1672.12 1922.49,1672.12 2045.67,1795.3 2045.67,1870.08 J1.1@2245.67,1870.08
RLY_LS_2: D7.1 J3.1 Q3.3 | length 540.1
  Top w20: Q3.3 1715.08,1452.66 1715.74,1452 1780.63,1452 1780.87,1452.25 D7.1 1786.06,1452 2040.98,1452 J3.1@2045.67,1456.69 ; J3.1@2045.67,1455.05 J3.1@2245.67,1455.05
VBAT: D1.2 D5.K FH2.1 K1.1 K1.4 K1.9 Q1.2 R1.2
VBAT_CTRL: C1.2 K1.5 K1.8 Q1.3 R8.2 R9.2 R20.2 U1.1 | length 933.8
  Top w8: v1(1871.36,248.31) R20.2
  Top w20: R8.2 v1(680.32,1400.69)
  Top w30: 1378.42,777.66 U1.1 ; 1465.5,690.59 U1.1
  Bottom w8: K1.8 1811.08,308.58 v1(1871.36,248.31)
  Bottom w20: v1(680.32,1400.69) 718.76,1362.25 v1(1015.24,1362.25)
VBAT_IN: FH1.1 J2.1
VCC_EXT: C6.2 D3.1 ISO1.1 J7.1 R16.2 R17.2 | length 80.7
  Top w20: ISO1.1 1852.26,894.95 1854.07,896.76 C6.2
VIN_CTRL: D5.A D8.1 J5.1 K1.12 Q4.3 R2.1 | length 1780.1
  Top w8: J5.1@116.54,1456.69 316.54,1456.69 479.41,1456.69 509.59,1426.51 509.59,1265.41 541.27,1233.73 571.82,1233.73 D8.1 ; D8.1 661.97,1182.51 781.37,1063.11 781.37,501.02 845.17,437.22 1015.26,437.22 1019.95,441.9 1019.95,470.38 Q4.3
VIN_CTRL_GATE: Q1.1 R1.1 R2.2 | length 190.7
  Top w8: R2.2 R1.1 1239.35,535.33 1257,517.68 1257,473.82 Q1.1
pads on no net: K1.3 K1.10 MTH1.1 MTH2.1 MTH3.1 MTH4.1 R11.3 R12.3 U1.4

## Polygon pours and split planes (outlines as drawn)
GND on Top "Top-GND" (solid, remove dead copper, pour order 475): 0,0 2362.2,0 2362.2,2362.2 0,2362.2
5V on Top "Top-5V" (solid, remove dead copper, pour order 474): 1651.34,0.09 2362.2,0 2362.2,445.45 2173.51,445.45 2173.51,614.91 2025.02,763.39 1716.88,763.39 1629.23,851.04 1629.23,1296.12 2362.3,1296.12 2362.3,2362.2 528.1,2362.2 528.1,1622.61 528.1,1250.17 703.53,1250.17 703.53,1151.6 835.55,1151.6 835.55,1336.96 928.02,1336.96 928.02,1591.91 1050.23,1714.11 1210.5,1714.11 1397,1527.61 1397,965.19 1523.59,838.61 1523.59,517.09 1651.34,389.34
VBAT_IN on Top "Top-VBAT_IN" (solid, pour order 473): 771.31,1132.25 0,1132.25 0,634.14 771.31,634.14
VBAT_CTRL on Top "Top-VIN" (solid, pour order 471): 1513,0 1641.83,0.08 1641.83,386.25 1513,515.08 1513,849.2 1389.22,972.98 1389.22,1321.86 1241.94,1321.87 1129.3,1434.5 982,1434.5 982,1309.23 1129.3,1309.23 1129.3,741.55 1253.73,741.55 1253.73,537.43 1280.29,510.87 1368.86,510.87 1513,366.74
VBAT on Top "Top-VBAT" (solid, pour order 468): 514.03,489.69 514.03,0 1505,0 1505,361.81 1364.81,502 1169,502 1169,419.14 1226,362.15 1226,161 812.03,161 812.03,489.69
VIN_CTRL on Top "Top-VIN_CTRL" (solid, pour order 467): 990.71,488 990.71,171.05 1217,171.05 1217,359.81 1160.17,416.64 1160.17,488
GND_EXT on Top "Top-GND_EXT_TVS" (solid, pour order 461): 2018.24,1222.68 1840.41,1222.68 1840.41,1098.01 2018.24,1098.01
GND_EXT on Top "Top-GND_EXT_CAP" (solid, pour order 464): 2192.78,466.91 2192.78,624.22 2092.98,724.03 2092.98,773.52 2362.2,773.52 2362.2,466.91
VCC_EXT on Top "Top-VCC_EXT" (solid, remove dead copper, pour order 465): 1649.56,860.71 1729.86,780.4 2362.2,780.4 2362.21,1273.94 1649.56,1273.94
GND on Bottom "Bot-GND" (solid, pour order 477): 0,0 2362.2,0 2362.2,2362.2 0,2362.2
GND_EXT on Bottom "Bot-GND_EXT" (solid, pour order 462): 2362.2,466.91 2192.78,466.91 2192.78,623.94 2036.31,780.4 1729.86,780.4 1648.97,861.3 1648.97,1273.94 2362.2,1273.94

## Silkscreen, mask and mechanical layers (free items; w line width, h text height)
Top Overlay:
  text "Ext LED" at 639.23,2290.21 h40
  text "GND" at 942.35,2149.04 h40 r90
  text "+5V" at 642.05,2146.43 h40 r90
  text "Buzzer" at 563.41,1942.65 h40
  text "Disable" at 932.18,1941.34 h40
  text "GND" at 92.75,1749.37 h40
  text "RLY 1" at 2120.62,1749.37 h40
  text "Voltage / Threshold / Control" at 1228.72,1640.34 h40
  text "Button" at 84.75,1624.93 h60
  text "RLY LS" at 1787.89,1622.01 h60
  text "CW = VTH-" at 910.1,1574.26 h40 r90
  text "CTRL" at 92.75,1540.42 h40
  text "RLY 2" at 2107.29,1540.42 h40
  text "VCC" at 2077.88,1014.23 h35
  text "SDA" at 2077.88,934.96 h35
  text "V+" at 65.9,784.63 h40
  text "SCL" at 2077.88,743 h35
  text "VBAT" at 57.9,660.2 h60
  text "GND" at 2077.88,654.36 h35
  text "V-" at 65.9,575.69 h40
Bottom Overlay:
  region: 1710.44,764.22 1201.85,764.22 1201.85,460.95 1710.44,460.95
  text ".Project_Name" at 1403.72,2030.36 h78.74
  text "Revision .Project_Revision" at 1416.71,1939.41 h40
  text "Designed by: / .Project_Designer1 / .Project_Designer2 / .Project_Designer3" at 1790.29,1526.52 h36
  text "2" at 1733.32,954.45 h393.7
  text "Serial #" at 1688.29,748.87 h39.37
Board Outline:
  the board outline again, w10